# Altium PCB Motion Sensor PCB.PcbDoc
Units mm, origin at the board's own origin, x right, y up, seen from the top; angles counter-clockwise.
Board outline 60 x 60 mm, 2 copper layers (Top Layer, Bottom Layer), stack 1.671 mm thick; 9 components, 67 nets, 59 pads, 13 vias.
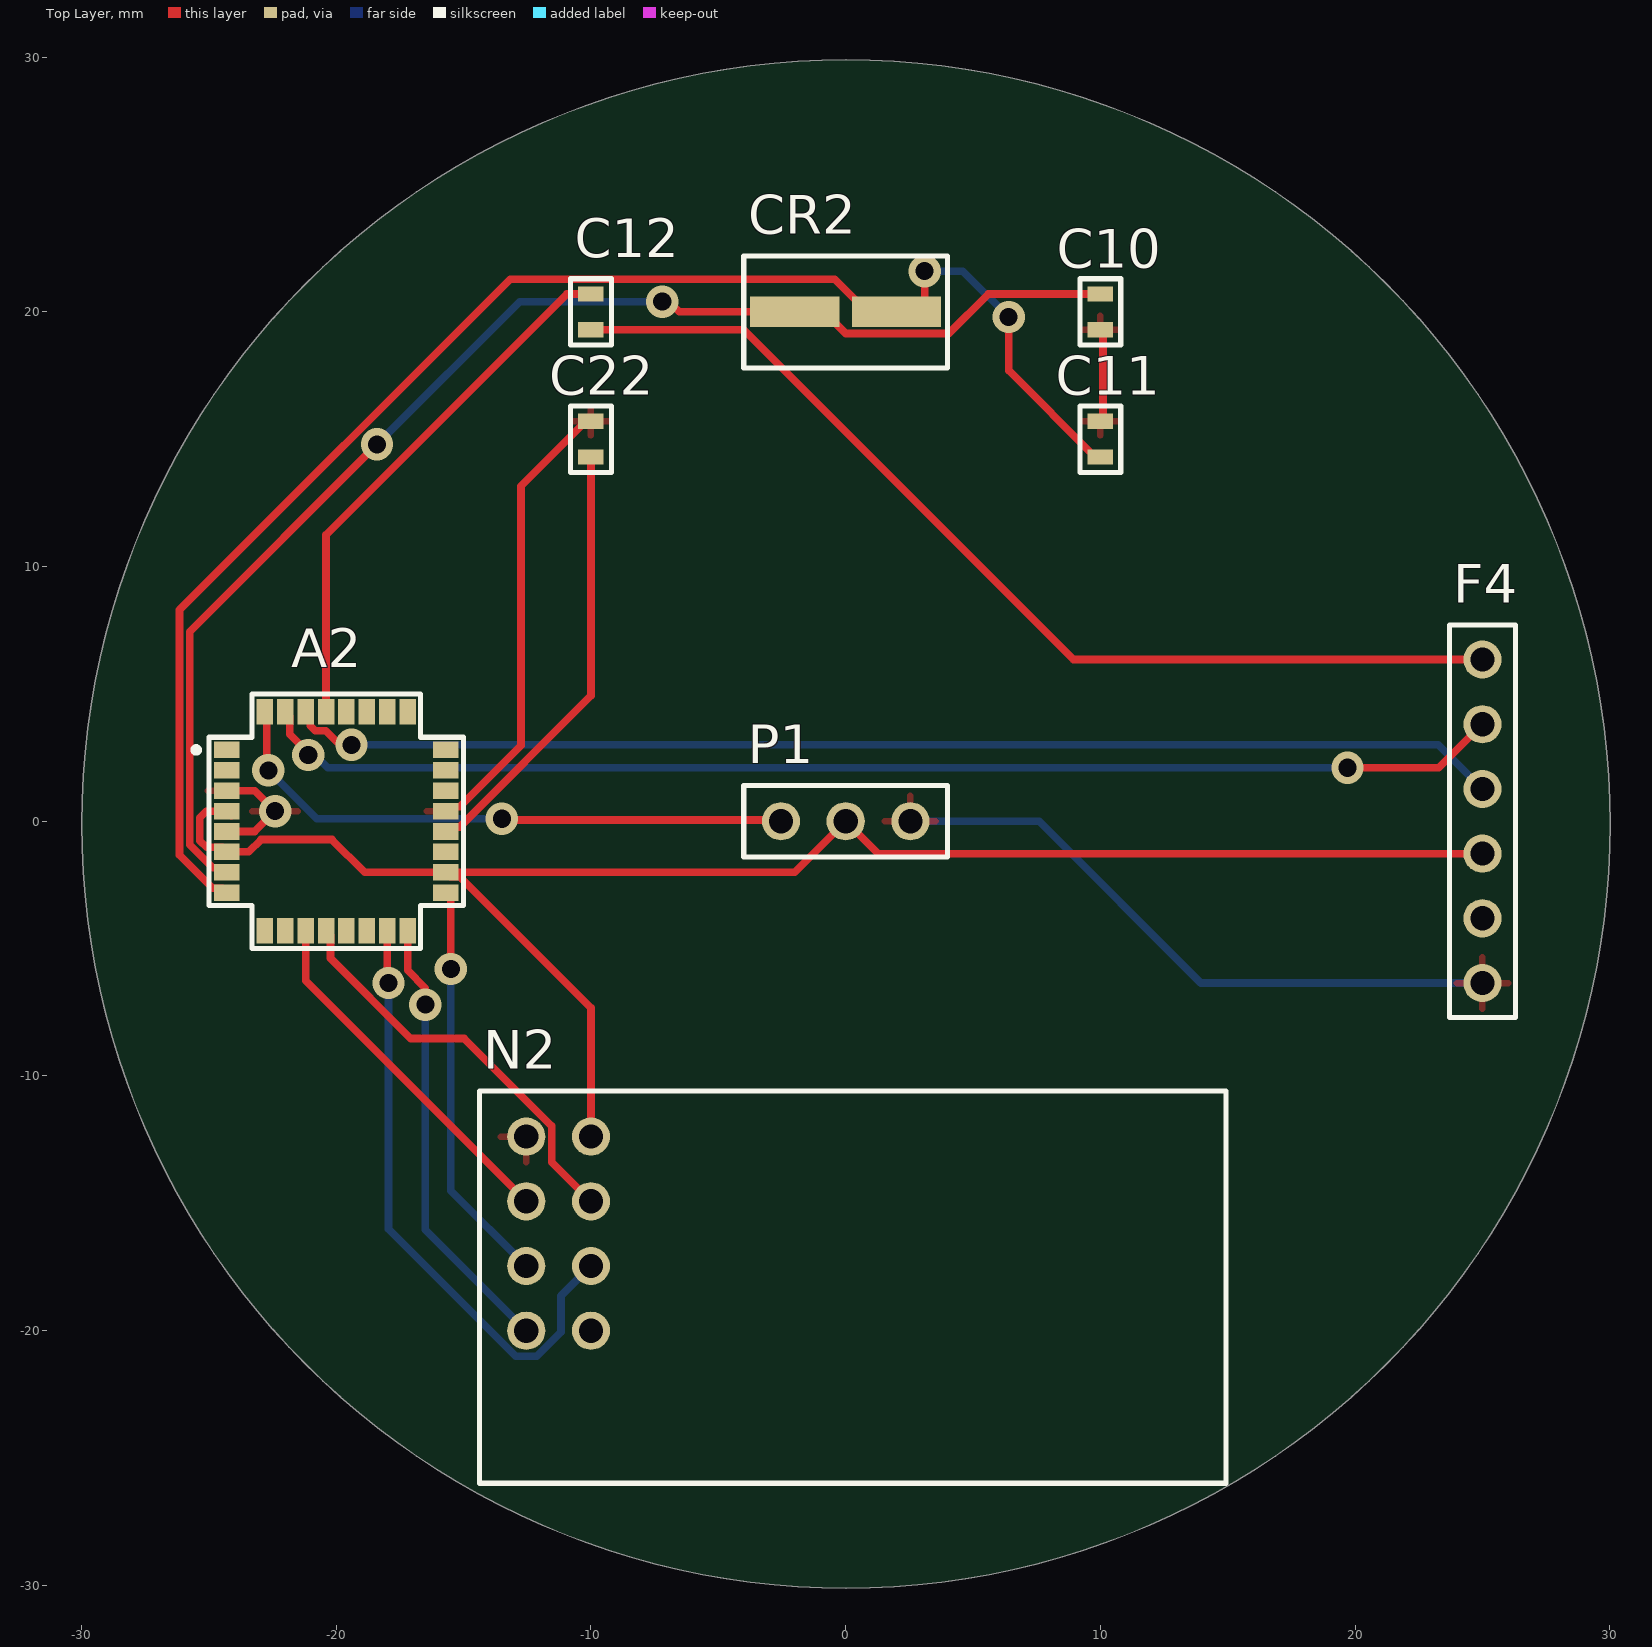
[diagram p0: Top Layer view]
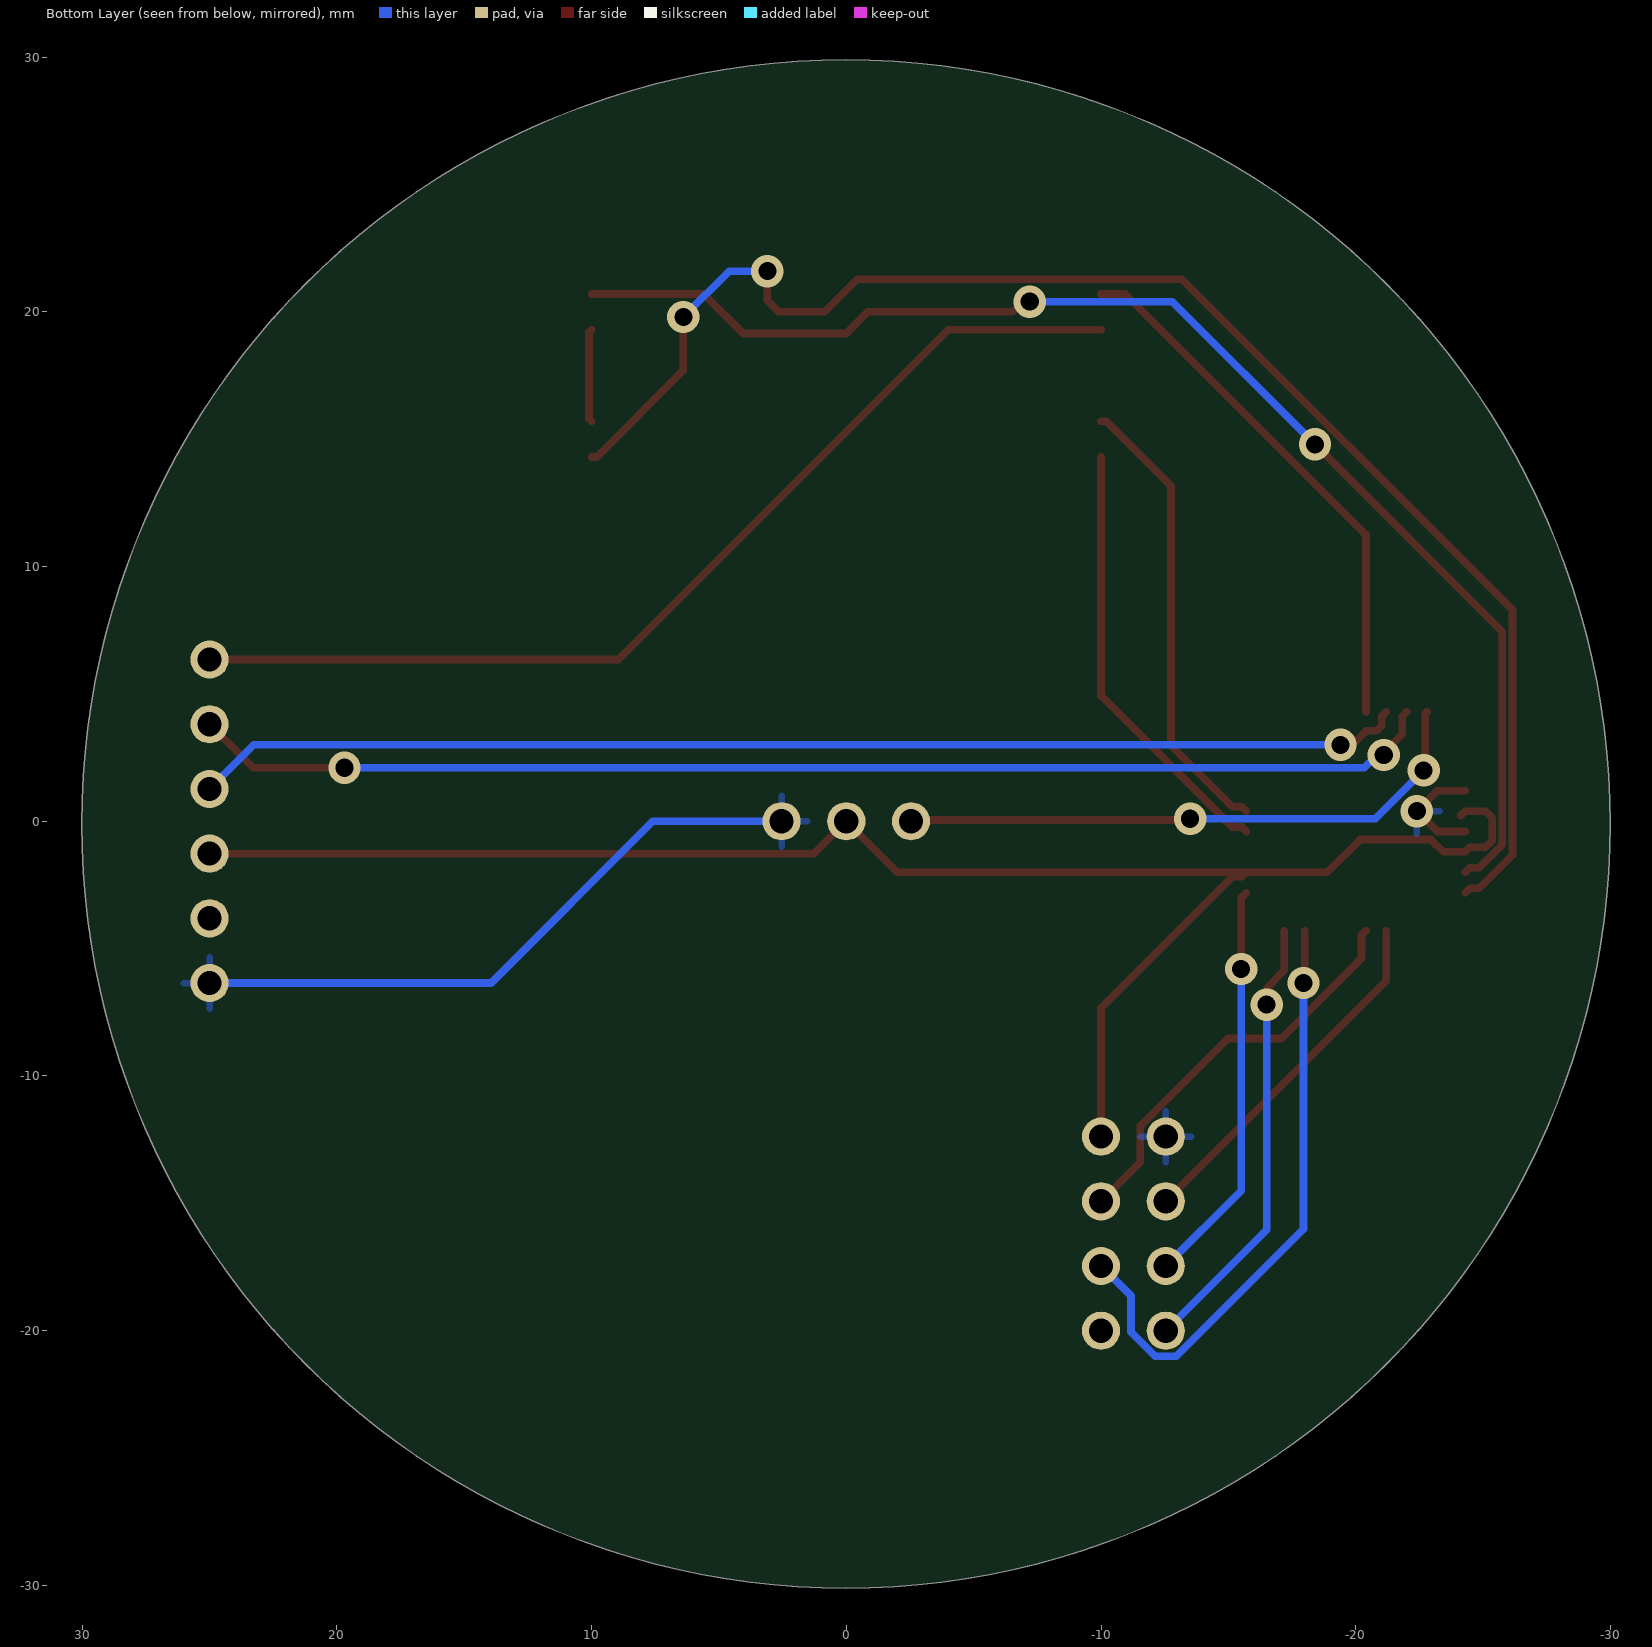
[diagram p1: Bottom Layer view, seen from below]
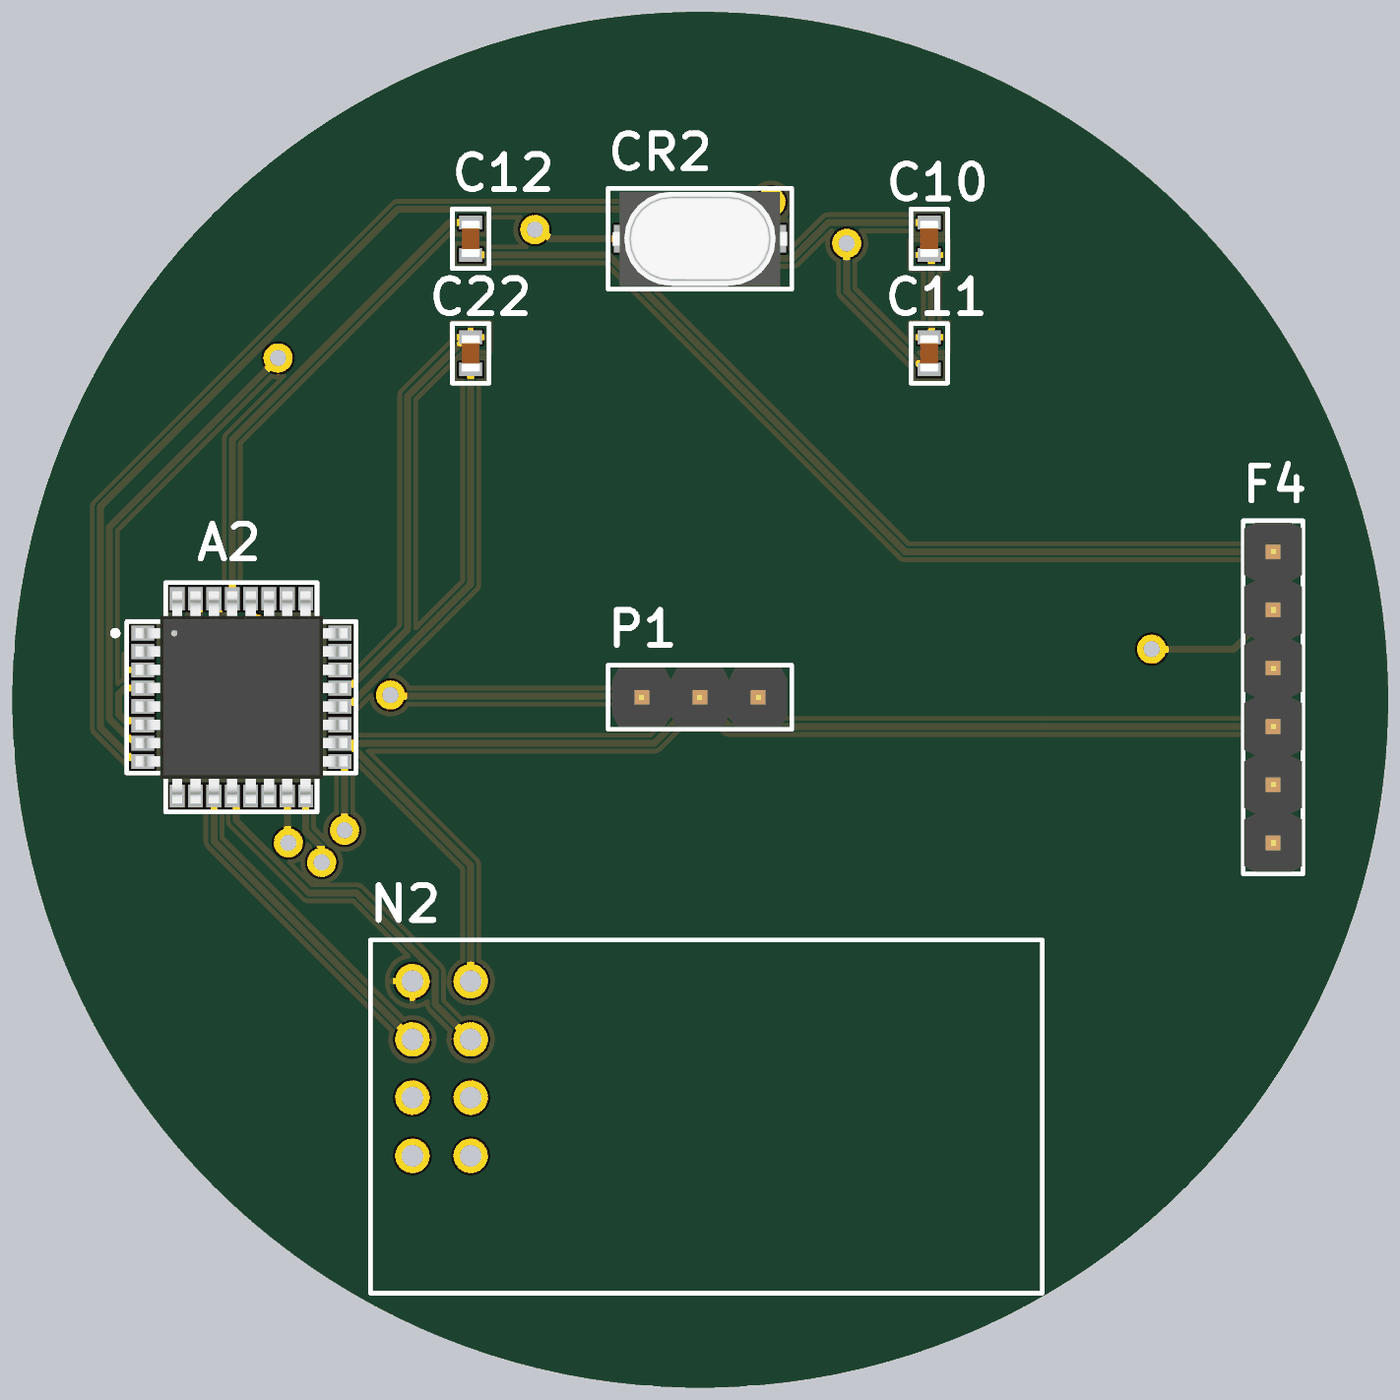
[diagram p2: 3D render of the assembled board from above, using the file's embedded part models]

## Layer stack, top to bottom
Top Solder: solder mask 0.0102, Solder Resist, Dk 3.5
Top Layer: signal copper 0.0356
Dielectric 1: dielectric 1.6, FR-4, Dk 4.8
Bottom Layer: signal copper 0.0356
Bottom Solder: solder mask 0.0102, Solder Resist, Dk 3.5

## Board outline
0.013,-30.107 cw(c0.013,-0.107) -29.987,-0.107 cw(c0.013,-0.107) 0.013,29.893 cw(c0.013,-0.107) 30.013,-0.107 cw(c0.013,-0.107)

## Design rules (kind name [scope] priority, off if disabled: settings)
Clearance [All] p1: gap=0.1 ignorepadtopadclearanceinfootprint=FALSE
HoleSize [All] p1: absolutevalues=TRUE maxlimit=2.54 minlimit=0 maxpercent=80.000 minpercent=20.000
HoleToHoleClearance [All] p1: gap=0.1 allowstackedmicrovias=TRUE
MinimumSolderMaskSliver [All] p1: minsoldermaskwidth=0.1
PolygonConnect [All] p1: connectstyle=Relief reliefconductorwidth=0.254 reliefentries=4 polygonreliefangle="90 Angle" airgapwidth=0.254
RoutingVias [All] p1: holewidth=0.3 width=0.6 viastyle="Through Hole" minholewidth=0.3 minwidth=0.6 maxholewidth=0.3 maxwidth=0.6
SilkToSilkClearance [All] p1: silktosilkclearance=0.1
SilkToSolderMaskClearance [IsPad] p1: minsilkscreentomaskgap=0 clearancetoexposedcopper=TRUE
SolderMaskExpansion [All] p1: expansion=0.102 istentingtop=FALSE
Width [All] p1: maxlimit=0.4 minlimit=0.1 preferedwidth=0.3
25 further rules are at their usual default settings.

## Components (designator, comment, footprint, x,y, rotation, side; value= is the part's Value field where it differs from the comment)
A2 "Atmega 328P" ATMega328P -20,0 r0 top
C10 "22pF" "22pF Capacitor" 10,20 r90 top
C11 "22pF" "22pF Capacitor" 10,15 r270 top
C12 "0.1uF" "0.1uF Capacitor" -10,20 r90 top
C22 "0.1uF" "0.1uF Capacitor" -10,15 r90 top
CR2 "16MHz Crystal" "16MHz Crystal" 0,20 r180 top
F4 "FTDI Breakout" FTDI 25,0 r0 top
N2 "NRF24L01" NRF24L01 -11.27,-16.19 r0 top
P1 "PIR Motion Sensor" "PIR Motion Sensor" 0,0 r90 top

## Footprints (in the part's own frame and the unit in brackets; to place one, negate y for a bottom-side part, rotate by r counter-clockwise, add the part's x,y. Pads: shape width x height; smd on the part's side, far side on the other; paste and mask are expansions set on the pad)
"0.1uF Capacitor" [mm]
  rect 0.6x1 smd: 1(-0.7,0) 2(0.7,0)
  silkscreen extent -1.3,-0.8 1.3,0.8, body extent -0.8,-0.4 0.8,0.41, height 0.9
"16MHz Crystal" [mm]
  rect 3.5x1.2 smd: 1(-2,0) 2(2,0)
  silkscreen extent -4,-2.2 4,2.2, body extent -3.8,-2.05 3.8,2.05, height 2.31
"22pF Capacitor" [mm]
  rect 0.6x1 smd: 1(-0.7,0) 2(0.7,0)
  silkscreen extent -1.3,-0.8 1.3,0.8, body extent -0.8,-0.41 0.8,0.4, height 0.9
ATMega328P [mm]
  rect 1x0.65 smd: 1(-4.3,2.8) 2(-4.3,2) 3(-4.3,1.2) 4(-4.3,0.4) 5(-4.3,-0.4) 6(-4.3,-1.2) 7(-4.3,-2) 8(-4.3,-2.8) 17(4.3,-2.8) 18(4.3,-2) 19(4.3,-1.2) 20(4.3,-0.4) 21(4.3,0.4) 22(4.3,1.2) 23(4.3,2) 24(4.3,2.8)
  rect 0.65x1 smd: 9(-2.8,-4.3) 10(-2,-4.3) 11(-1.2,-4.3) 12(-0.4,-4.3) 13(0.4,-4.3) 14(1.2,-4.3) 15(2,-4.3) 16(2.8,-4.3) 25(2.8,4.3) 26(2,4.3) 27(1.2,4.3) 28(0.4,4.3) 29(-0.4,4.3) 30(-1.2,4.3) 31(-2,4.3) 32(-2.8,4.3)
  silkscreen extent -5.6,-5 5,5, body extent -4.62,-4.62 4.63,4.63, height 1.2
FTDI [mm]
  round 1.5 hole 0.95: 1(0,6.35) 2(0,3.81) 3(0,1.27) 4(0,-1.27) 5(0,-3.81) 6(0,-6.35)
  silkscreen extent -1.3,-7.7 1.3,7.7, body extent -1.27,-7.62 1.27,7.62, height 5.55
NRF24L01 [mm]
  round 1.5 hole 0.95: 1(-1.27,3.81) 2(-1.27,1.27) 3(-1.27,-1.27) 4(-1.27,-3.81) 5(1.27,3.81) 6(1.27,1.27) 7(1.27,-1.27) 8(1.27,-3.81)
  silkscreen extent -3.1,-9.8 26.2,5.6, body extent -2.91,-9.59 26.09,5.41, height 6.21
"PIR Motion Sensor" [mm]
  round 1.5 hole 0.95: 1(0,-2.54) 2(0,0) 3(0,2.54)
  silkscreen extent -1.4,-4 1.4,4, body extent -1.27,-3.81 1.27,3.81, height 5.55

## Part data
A2: library part ATMEGA328PB-AUR, "IC MCU 8BIT 32KB FLASH 32TQFP", Case/Package=TQFP, Frequency=20MHz, Manufacturer=Microchip, Max Operating Temperature=85°C, Min Operating Temperature=-40°C, Supplier Part Number 1=ATMEGA328PB-AURCT-ND, Category=Microcontrollers, ComponentLink1Description=http://www.microchip.com/mymicrochip/filehandler.aspx?ddocname=en589666&src-supplier=Digi-Key, ComponentLink1URL=http://www.microchip.com/mymicrochip/filehandler.aspx?ddocname=en589666&src-supplier=Digi-Key, Core Architecture=AVR, Interface=I2C,SPI,UART,USART, Manufacturer Part Number=ATMEGA328PB-AUR, Memory Size=32KB, Memory Type=FLASH, Number of I/Os=27, Number of Pins=32, Oscillator Type=Internal, Packaging="Tape and Reel", Peripherals="Brown-out Detect/Reset,POR,PWM,WDT", Pricing 1="1=1.42000, 25=1.30000, 100=1.18000 (USD)", RoHS=No, Stock 1=9971, Supplier 1=Digi-Key
C10 C11: library part 06035A220JAT2A, "Cap Ceramic 22pF 50V C0G 5% SMD 0603 125C Paper T/R", Case Code (Imperial)=0603, Case Code (Metric)=1608, Dielectric=C0G, Dielectric Material=Ceramic, Insulation Resistance=100GR, Manufacturer="Kyocera AVX", Max Operating Temperature=125°C, Min Operating Temperature=-55°C, Package Quantity=1, Supplier Part Number 1=478-1167-1-ND, Temperature Coefficient=30ppm/°C, Tolerance=5%, Voltage=50V, Capacitance=22pF, Case/Package=0603, Category="Ceramic Capacitors", ComponentLink1Description=https://datasheet.ciiva.com/11788/0900766b802d4697-11788031.pdf?src-supplier=RSComponents, ComponentLink1URL=https://datasheet.ciiva.com/11788/0900766b802d4697-11788031.pdf?src-supplier=RSComponents, ComponentLink2Description=https://datasheet.ciiva.com/16351/ccog-16351125.pdf?src-supplier=Future+Electronics, ComponentLink2URL=https://datasheet.ciiva.com/16351/ccog-16351125.pdf?src-supplier=Future+Electronics, ComponentLink3Description=https://datasheet.ciiva.com/1124/759117-1124728.pdf?src-supplier=Element14, ComponentLink3URL=https://datasheet.ciiva.com/1124/759117-1124728.pdf?src-supplier=Element14, ComponentLink4Description=https://datasheet.ciiva.com/7855/759117-7855064.pdf?src-supplier=Element14, ComponentLink4URL=https://datasheet.ciiva.com/7855/759117-7855064.pdf?src-supplier=Element14, ComponentLink5Description=https://datasheet.ciiva.com/150/ccog-150366.pdf?src-supplier=Digi-Key, ComponentLink5URL=https://datasheet.ciiva.com/150/ccog-150366.pdf?src-supplier=Digi-Key, ComponentLink6Description=https://datasheet.ciiva.com/150/ccog-150367.pdf?src-supplier=Digi-Key, ComponentLink6URL=https://datasheet.ciiva.com/150/ccog-150367.pdf?src-supplier=Digi-Key, Contact Plating=Tin,Matte, Depth=0.81mm, Height=0.63mm, Lead Free="Lead Free", Length=1.6mm, Manufacturer Part Number=06035A220JAT2A, Mount="Surface Mount,PCB", Number of Pins=2, Packaging="Tape and Reel", Pricing 1="1=0.10000, 10=0.05600, 50=0.03040, 100=0.02480, 500=0.01772, 1000=0.01392 (USD)", Radiation Hardening=No, REACH SVHC="No SVHC", RoHS=Yes, Stock 1=678111, Supplier 1=Digi-Key, Termination=SMD/SMT, Thickness=0.035inch, Voltage Rating=50V, Voltage Rating (DC)=50V, Width=0.81mm
C12 C22: library part 06033C104KAT4A, "CAP CER 0.1UF 25V X7R 0603", Capacitance=100nF, Case Code (Imperial)=0603, Case Code (Metric)=1608, Dielectric=X7R, Manufacturer="Kyocera AVX", Max Operating Temperature=125°C, Min Operating Temperature=-55°C, Package Quantity=1, Supplier Part Number 1=478-7018-1-ND, Tolerance=10%, Voltage Rating=25V, Case/Package=0603, Category="Ceramic Capacitors", ComponentLink1Description=https://datasheet.ciiva.com/22619/1679506-22619862.pdf?src-supplier=Element14, ComponentLink1URL=https://datasheet.ciiva.com/22619/1679506-22619862.pdf?src-supplier=Element14, ComponentLink2Description=https://datasheet.ciiva.com/28613/1679506-28613035.pdf?src-supplier=Element14, ComponentLink2URL=https://datasheet.ciiva.com/28613/1679506-28613035.pdf?src-supplier=Element14, ComponentLink3Description=https://datasheet.ciiva.com/6277/cx7r-6277758.pdf?src-supplier=Digi-Key, ComponentLink3URL=https://datasheet.ciiva.com/6277/cx7r-6277758.pdf?src-supplier=Digi-Key, ComponentLink4Description=https://datasheet.ciiva.com/6277/cx7r-6277759.pdf?src-supplier=Digi-Key, ComponentLink4URL=https://datasheet.ciiva.com/6277/cx7r-6277759.pdf?src-supplier=Digi-Key, Depth=0.81mm, Height=0.9mm, Lead Free="Lead Free", Length=1.6mm, Manufacturer Part Number=06033C104KAT4A, Mount="Surface Mount", Number of Pins=2, Packaging="Tape and Reel", Pricing 1="1=0.10000, 10=0.04200, 50=0.02320, 100=0.01890, 500=0.01348, 1000=0.01059, 2500=0.00962, 5000=0.00886 (USD)", REACH SVHC="No SVHC", RoHS=Yes, Stock 1=6112957, Supplier 1=Digi-Key, Termination=SMD/SMT, Thickness=0.035inch, Voltage Rating (DC)=25V, Width=0.032inch
CR2: library part ECS-160-20-3X-TR, "CRYSTAL 16.0000MHZ 20PF SMD", ESR (Equivalent Series Resistance)=50R, Frequency=16MHz, Frequency Stability=50ppm, Frequency Tolerance=30ppm, Load Capacitance=20pF, Manufacturer="ECS International", Max Operating Temperature=70°C, Min Operating Temperature=-10°C, Package Quantity=1, Supplier Part Number 1=XC1776CT-ND, Category=Crystals, ComponentLink1Description=https://datasheet.ciiva.com/852/csm-3x-852328.pdf?src-supplier=Digi-Key, ComponentLink1URL=https://datasheet.ciiva.com/852/csm-3x-852328.pdf?src-supplier=Digi-Key, ComponentLink2Description=https://datasheet.ciiva.com/852/csm-3x-852329.pdf?src-supplier=Digi-Key, ComponentLink2URL=https://datasheet.ciiva.com/852/csm-3x-852329.pdf?src-supplier=Digi-Key, ComponentLink3Description=https://datasheet.ciiva.com/852/csm-3x-852330.pdf?src-supplier=Digi-Key, ComponentLink3URL=https://datasheet.ciiva.com/852/csm-3x-852330.pdf?src-supplier=Digi-Key, Height=0.091inch, Lead Free="Lead Free", Length=0.276inch, Manufacturer Part Number=ECS-160-20-3X-TR, Mount="Surface Mount", Packaging="Tape and Reel", Pricing 1="1=0.35000, 10=0.28800, 50=0.25880, 100=0.23000, 500=0.21850, 1000=0.18400 (USD)", RoHS=Yes, Stock 1=6685, Supplier 1=Digi-Key, Termination=SMD/SMT, Tolerance=30ppm, Width=0.161inch
F4: library part FTDI, "FTDI USB to TTL serial converter module"
N2: "3.3V NRF24L01 WIRELESS RF MODULE"
P1: library part 555-28027, "Pyroelectric IR sensor, 555-28027, Parallax", Case/Package=Module, Manufacturer=Parallax, Max Operating Temperature=50°C, Max Supply Voltage (DC)=6V, Min Operating Temperature=0°C, Min Supply Voltage (DC)=3V, Operating Supply Current=23mA, Package Quantity=1, Supplier Part Number 1=555-28027-ND, Category="Embedded Processors and Controllers", ComponentLink1Description=https://datasheet.ciiva.com/14091/555-28027-eng-tds-14091219.pdf?src-supplier=Distrelec, ComponentLink1URL=https://datasheet.ciiva.com/14091/555-28027-eng-tds-14091219.pdf?src-supplier=Distrelec, ComponentLink2Description=https://datasheet.ciiva.com/5297/pirsensor-v1-2-27724-5297156.pdf?src-supplier=Mouser, ComponentLink2URL=https://datasheet.ciiva.com/5297/pirsensor-v1-2-27724-5297156.pdf?src-supplier=Mouser, ComponentLink3Description=https://datasheet.ciiva.com/19458/2082927-19458486.pdf?src-supplier=Jameco, ComponentLink3URL=https://datasheet.ciiva.com/19458/2082927-19458486.pdf?src-supplier=Jameco, ComponentLink4Description=https://datasheet.ciiva.com/30475/0900766b8125a3ed-30475657.pdf?src-supplier=RSComponents, ComponentLink4URL=https://datasheet.ciiva.com/30475/0900766b8125a3ed-30475657.pdf?src-supplier=RSComponents, ComponentLink5Description=https://datasheet.ciiva.com/2818/555-28027-pir-sensor-prodcut-doc-v2-2-2818610.pdf?src-supplier=Digi-Key, ComponentLink5URL=https://datasheet.ciiva.com/2818/555-28027-pir-sensor-prodcut-doc-v2-2-2818610.pdf?src-supplier=Digi-Key, Height=25.4mm, Length=32.2mm, Manufacturer Part Number=555-28027, Packaging=Bulk, Pricing 1="1=14.99000, 5=14.40000 (USD)", RoHS=Yes, Sensing Distance=240inch, Sensing Method="Infrared (IR)", Stock 1=2330, Supplier 1=Digi-Key, Weight=0.3264oz, Width=24.3mm

## Via types
v1: diameter 1.27, hole 0.711, Top Layer to Bottom Layer, 13 vias

## Nets (pads, with @x,y where several pads share a name; then routed paths per layer and width w, separated by ;. In a path a pad name is that pad's centre, name@x,y a point inside that pad or via, vN(x,y) a via of type N, cw(c..) or ccw(c..) an arc to the next point about the centre after c; other vN are vias at no path point)
2K: 
3.7V: 
100: 
+3V3: A2.4 A2.6 A2.18 F4.4 N2.5 P1.2 | length 67.9
  Top Layer w0.3: A2.4@-24.125,0.225 A2.4 -25.1,0.4 -25.356,0.144 -25.356,-0.756 -25.088,-1.025 -24.475,-1.025 A2.6 -23.434,-1.2 -22.952,-0.718 -20.169,-0.718 -18.887,-2 A2.18 ; N2.5 -10,-7.321 -15.146,-2.175 -15.525,-2.175 A2.18 ; F4.4 1.27,-1.27 P1.2 -2,-2 A2.18
ADC6: 
ADC7: 
C5: 
C12: A2.29 C12.2 | length 21.3
  Top Layer w0.3: A2.29 -20.4,11.25 -10.95,20.7 C12.2
C21: 
C24: 
CE: 
GND: A2.3 A2.5 A2.21 C10.1 C11.1 C22.2 F4.6 N2.1 P1.1 | length 51.2
  Top Layer w0.3: A2.5 -23.2,-0.4 v1(-22.4,0.4) -23.2,1.2 A2.3 ; A2.21 -15.525,0.575 -15.146,0.575 -12.748,2.973 -12.748,13.152 -10.2,15.7 C22.2 ; C11.1 10.101,15.801 10.101,19.199 C10.1
  Bottom Layer w0.3: P1.1 7.6,0 13.95,-6.35 F4.6
NetA1_98: 
NetA2_20: A2.20 C22.1 | length 17.3
  Top Layer w0.3: A2.20 -15.525,-0.225 -15.146,-0.225 -10,4.921 C22.1
NetA3_20: 
NetA4_20: 
NetA5_20: 
NetC2_2: 
NetC12_1: C12.1 F4.1 | length 40.4
  Top Layer w0.3: C12.1 -4.004,19.3 8.946,6.35 F4.1
NetC15_1: 
NetC21_1: 
NetC24_1: 
NetC26_1: 
NetF2_2: 
NetG1_1: 
NetG1_2: 
NetO1_8: 
NetQ1_1: 
NetQ2_1: 
NetR4_2: 
NetR5_1: 
NetR5_2: 
OC: 
OD: 
PB0: A2.12 N2.6 | length 16.2
  Top Layer w0.3: A2.12 -20.225,-4.475 -20.225,-5.375 -17.07,-8.53 -14.976,-8.53 -11.54,-11.966 -11.54,-13.38 N2.6
PB1: 
PB2: 
PB3: A2.15 N2.7 | length 24
  Top Layer w0.3: A2.15 -18,-6.3 v1(-17.95,-6.35)
  Bottom Layer w0.3: v1(-17.95,-6.35) -17.95,-16.004 -12.954,-21 -12.126,-21 -11.178,-20.052 -11.178,-18.638 N2.7
PB4: A2.16 N2.4 | length 17.6
  Top Layer w0.3: A2.16 -17.2,-5.848 -16.5,-6.548 v1(-16.5,-7.2)
  Bottom Layer w0.3: v1(-16.5,-7.2) -16.5,-16.04 N2.4
PB5: A2.17 N2.3 | length 16
  Top Layer w0.3: A2.17 -15.5,-3 v1(-15.5,-5.8)
  Bottom Layer w0.3: v1(-15.5,-5.8) -15.5,-14.5 N2.3
PB6: A2.7 C10.2 CR2.2 | length 52.6
  Top Layer w0.3: A2.7 -24.475,-1.825 -24.854,-1.825 -25.756,-0.922 -25.756,7.444 v1(-18.4,14.8) ; v1(-7.2,20.4) -6.938,20.4 -6.538,20 -0.85,20 0,19.15 4.05,19.15 5.6,20.7 C10.2
  Bottom Layer w0.3: v1(-18.4,14.8) -12.8,20.4 v1(-7.2,20.4)
PB7: A2.8 C11.2 CR2.1 | length 59.7
  Top Layer w0.3: A2.8 -24.475,-2.625 -24.854,-2.625 -26.156,-1.322 -26.156,8.295 -13.167,21.285 -0.435,21.285 0.85,20 2.65,20 3.1,20.45 v1(3.1,21.6) ; v1(6.4,19.8) 6.4,17.7 9.8,14.3 C11.2
  Bottom Layer w0.3: v1(3.1,21.6) 4.6,21.6 v1(6.4,19.8)
PC0: 
PC1: 
PC2: 
PC3: 
PC5: 
PD0: A2.30 F4.3 | length 47.7
  Top Layer w0.3: A2.30 -21.025,4.125 -21.025,3.746 -20.829,3.55 -20.412,3.55 -19.862,3 v1(-19.4,3)
  Bottom Layer w0.3: v1(-19.4,3) 23.27,3 F4.3
PD1: A2.31 F4.2 | length 49.1
  Top Layer w0.3: A2.31 -21.825,4.125 -21.825,3.425 -21.1,2.7 v1(-21.1,2.6) ; v1(19.7,2.1) 23.29,2.1 F4.2
  Bottom Layer w0.3: v1(-21.1,2.6) -20.837,2.6 -20.337,2.1 v1(19.7,2.1)
PD2: A2.32 P1.3 | length 23.3
  Top Layer w0.3: A2.32 -22.732,4.233 -22.732,2.067 v1(-22.665,2) ; v1(-13.5,0.1) -13.45,0.05 -2.59,0.05 P1.3
  Bottom Layer w0.3: v1(-22.665,2) -20.765,0.1 v1(-13.5,0.1)
PD3: 
PD4: 
PD5: 
PD6: 
PD7: A2.11 N2.2 | length 14.2
  Top Layer w0.3: A2.11 -21.2,-6.26 N2.2
PE0: 
PE1: 
PE4: 
PE5: 
PF0: 
PH4: 
PH5: 
RS: 
S2: 
SW: 
XTAL1: 
XTAL2: 
pads on no net: A2.1 A2.2 A2.9 A2.10 A2.13 A2.14 A2.19 A2.22 A2.23 A2.24 A2.25 A2.26 A2.27 A2.28 F4.5 N2.8

## Polygon pours and split planes (outlines as drawn)
GND on Top Layer "NONET_L-01_P-001" (none, remove dead copper, pour order 0): -30,34.2 -28.4,35.8 34.9,35.8 34.9,-36.8 35,-36.9 31.9,-40 -30,-40
GND on Bottom Layer "NONET_L-01_P-001" (none, remove dead copper, pour order 1): -30,38.3 50.6,38.3 51,37.9 51,-40 -30,-40

## Silkscreen, mask and mechanical layers (free items; w line width, h text height)
Board Outline:
  circle w0.013: c0.013,-0.107 r30